# Altium PCB Mach dieu khien tu xa.PcbDoc
Units mm, origin at the board's own origin, x right, y up, seen from the top; angles counter-clockwise.
Board outline 143 x 70 mm, 2 copper layers (Top Layer, Bottom Layer); 76 components, 54 nets, 226 pads, 214 vias.
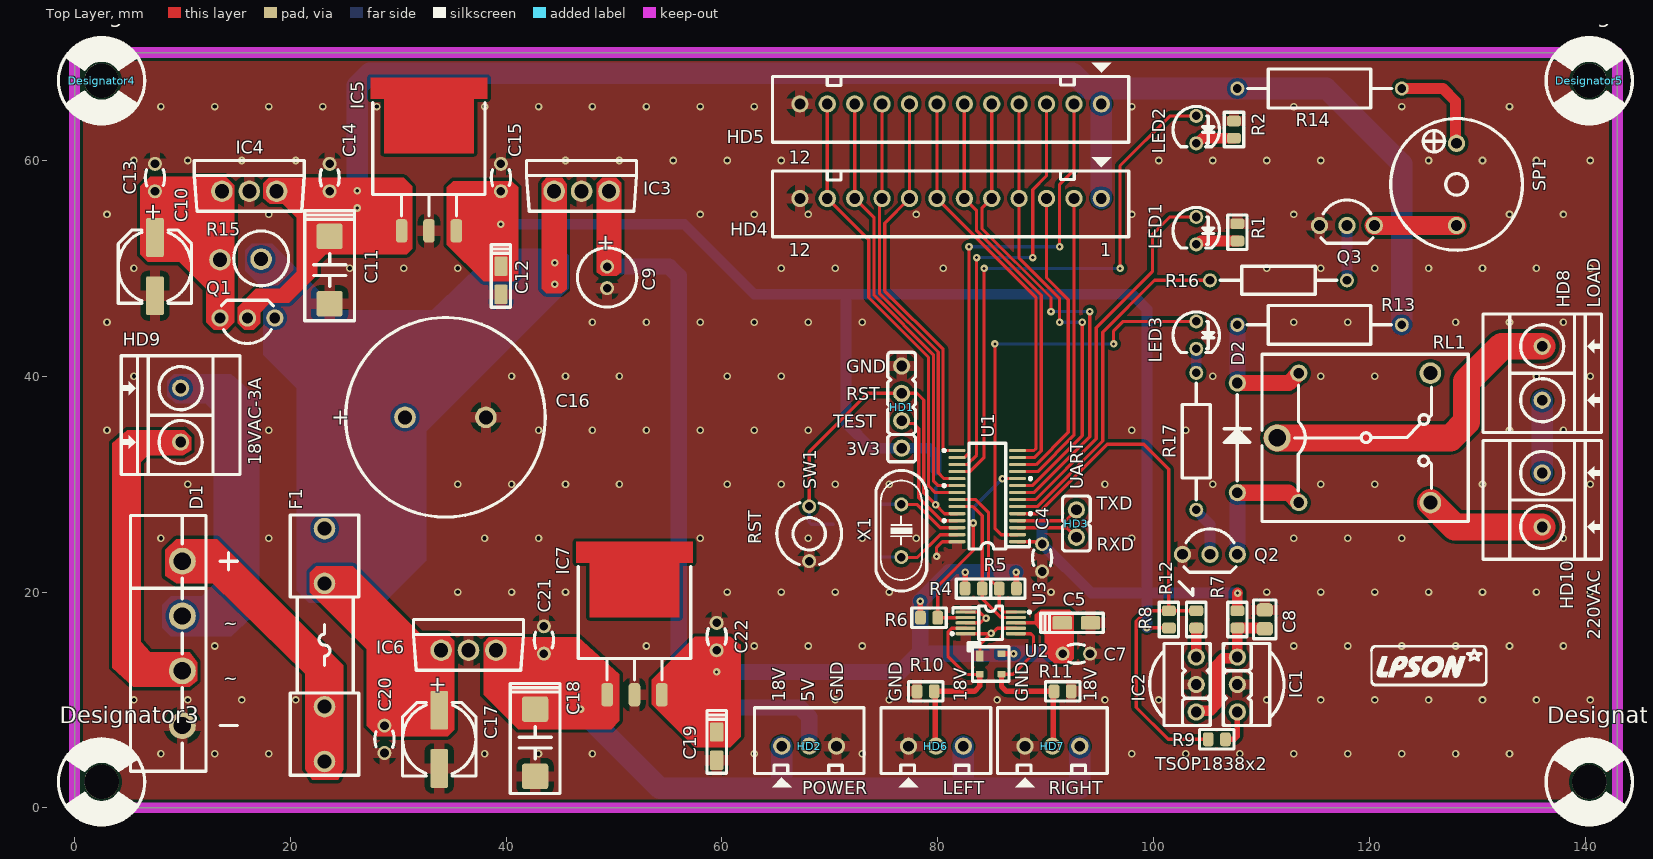
[diagram p0: Top Layer view]
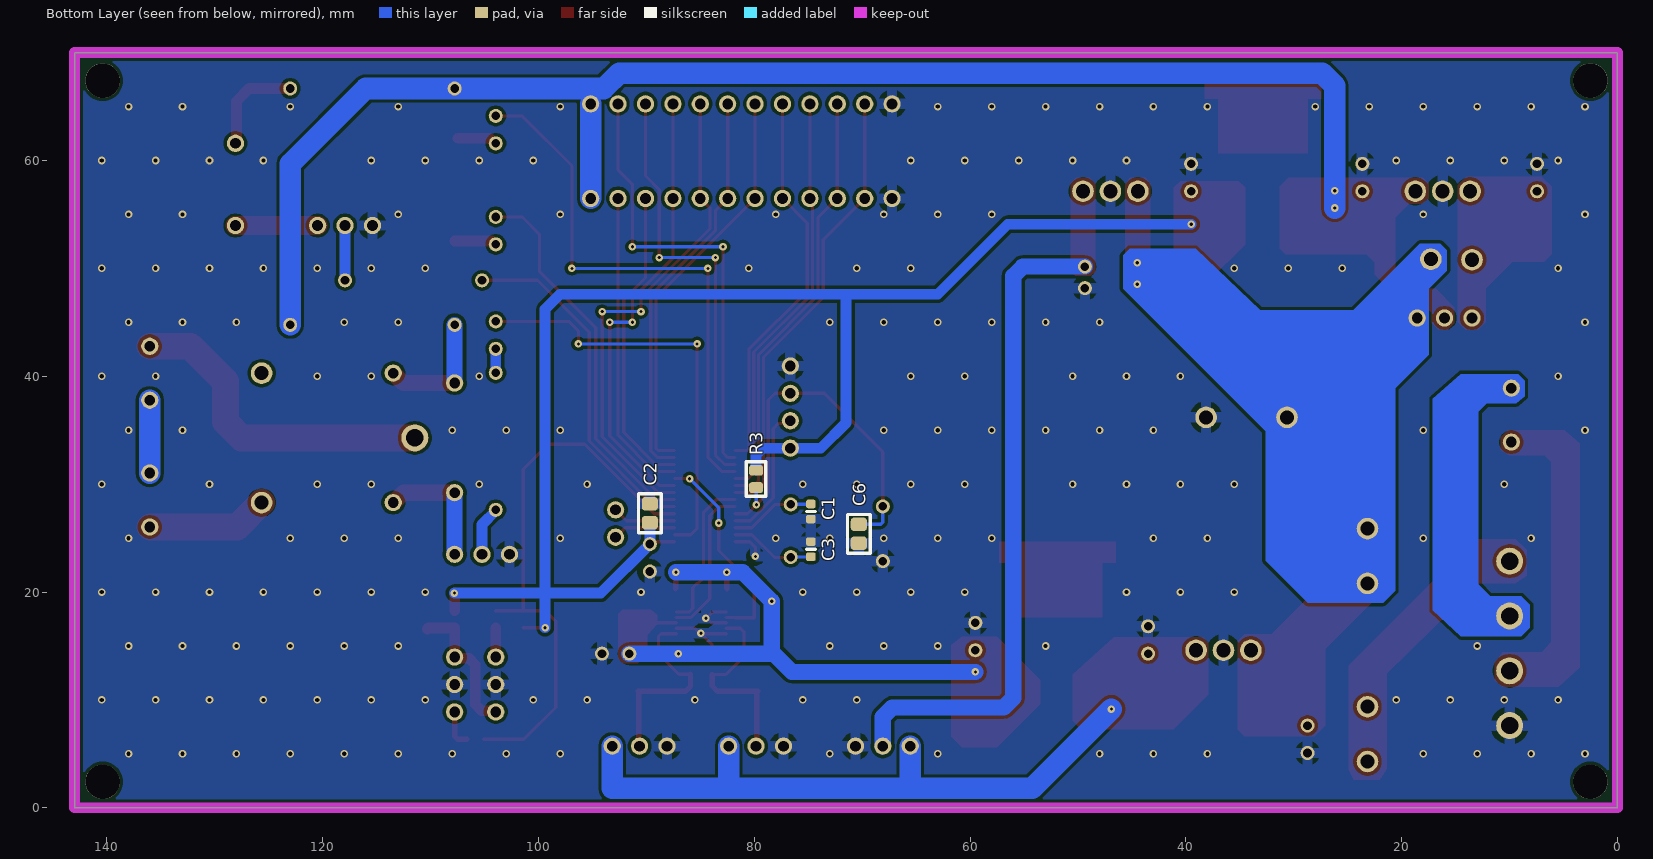
[diagram p1: Bottom Layer view, seen from below]

## Layer stack, top to bottom
Top Solder: solder mask 0.0102, Solder Resist, Dk 3.5
Top Layer: signal copper 0.0356
Dielectric1: dielectric 0.32, FR-4, Dk 4.8
Bottom Layer: signal copper 0.0356
Bottom Solder: solder mask 0.0102, Solder Resist, Dk 3.5

## Board outline
0,0 0,70 143,70 143,0

## Design rules (kind name [scope] priority, off if disabled: settings)
Clearance [All] p1: gap=0.3 ignorepadtopadclearanceinfootprint=FALSE except(0.15: Arc-Arc Arc-Track Arc-SMDPad Arc-THPad Arc-Via Arc-Text Arc-Hole Track-Track Track-SMDPad Track-THPad Track-Via Track-Text Track-Hole SMDPad-SMDPad SMDPad-THPad SMDPad-Via SMDPad-Text SMDPad-Hole THPad-THPad THPad-Via THPad-Text THPad-Hole Via-Via Via-Text Via-Hole Text-Text Text-Hole)
PlaneConnect [All] p1: planeconnectstyle=Relief reliefexpansion=0.5 reliefentries=4 reliefconductorwidth=0.5 reliefairgap=0.5
PolygonConnect [All] p1: connectstyle=Relief reliefconductorwidth=1 reliefentries=4 polygonreliefangle="90 Angle" airgapwidth=0.5
RoutingVias RoutingVias_POWER [InNetClass('POWER')] p1: holewidth=0.3 width=0.7 viastyle="Through Hole" minholewidth=0.3 minwidth=0.7 maxholewidth=0.6 maxwidth=1.1
RoutingVias RoutingVias_SIGNAL [All] p2: holewidth=0.3 width=0.7 viastyle="Through Hole" minholewidth=0.3 minwidth=0.7 maxholewidth=0.3 maxwidth=0.7
SolderMaskExpansion [All] p1: expansion=0.102 istentingtop=FALSE
Width Width_POWER [InNetClass('POWER')] p1: maxlimit=3 minlimit=0.3 preferedwidth=0.5
Width Width_SIGNAL [All] p2: maxlimit=0.3 minlimit=0.3 preferedwidth=0.3
29 further rules are at their usual default settings.

## Classes and differential pairs
net class POWER: 3.3VA 3V3 5V 12V 18V AIN0 AIN2 LEDA1 LEDA2 LEDB1 LEDB2 NetC8_1 NetC10_1 NetC16_1 NetD1_1 NetD1_2 NetD1_3 NetD2_1 NetD2_2 NetHD8_1 NetHD8_2 NetHD10_1 NetIC1_3 NetIC2_3 NetLED1_2 NetLED2_2 NetLED3_2 NetQ2_2 NetQ3_2 NetQ3_3 NetR4_1 NetR5_1 NetR14_2
component class "Mach dieu khien tu xa": C1 C2 C3 C4 C5 C6 C7 C8 C9 C10 C11 C12 C13 C14 C15 C16 C17 C18 C19 C20 C21 C22 D1 D2 F1 HD1 HD2 HD3 HD4 HD5 HD6 HD7 HD8 HD9 HD10 IC1 IC2 IC3 IC4 IC5 IC6 IC7 LED1 LED2 LED3 Q1 Q2 Q3 R1 R2 R3 R4 R5 R6 R7 R8 R9 R10 R11 R12 R13 R14 R15 R16 R17 RL1 SP1 SW1 U1 U2 U3 X1

## Components (designator, comment, footprint, x,y, rotation, side; value= is the part's Value field where it differs from the comment)
C1 "22pF" C0603 74.755,27.464 r90 bottom
C2 "10uF/16V" C0805 89.677,27.305 r90 bottom value=10uF/50V
C3 "22pF" C0603 74.755,23.971 r270 bottom
C4 "100nF/16V" "Tu gom 104" 89.677,23.178 r90 top value=0.1uF
C5 "10uF/16V" CAP_TANTA_10UF_16V 92.852,17.145 r0 top
C6 "1nF" C0805 70.31,25.4 r90 bottom
C7 "100nF/16V" "Tu gom 104" 92.852,14.287 r180 top value=0.1uF
C8 "Cap Pol1" C0805 110.315,17.462 r90 top value=4.7uF/16V
C9 "10uF/16V" CAP_10UF_16V 49.355,50.165 r270 top
C10 "10uF/50V" C_FC_10UF_50V 7.445,50.165 r270 top
C11 "10uF/35V" CAP_TANTA_10UF_35V 23.637,49.848 r270 top
C12 "10uF/16V" CAP_TANTA_10UF_16V 39.512,48.895 r270 top
C13 "100nF/50V" "Tu gom 104" 7.445,58.42 r270 top value=0.1uF
C14 "100nF/25V" "Tu gom 104" 23.637,58.42 r270 top value=0.1uF
C15 "100nF/16V" "Tu gom 104" 39.512,58.42 r270 top value=0.1uF
C16 "3300uF/50V" CAP_3300UF_50V 30.622,36.195 r0 top value=10uF/50V
C17 "10uF/50V" C_FC_10UF_50V 33.797,6.35 r270 top
C18 "10uF/35V" CAP_TANTA_10UF_35V 42.687,6.032 r270 top
C19 "10uF/16V" CAP_TANTA_10UF_16V 59.515,5.715 r270 top
C20 "100nF/50V" "Tu gom 104" 28.717,6.35 r90 top value=0.1uF
C21 "100nF/25V" "Tu gom 104" 43.498,15.557 r270 top value=0.1uF
C22 "100nF/16V" "Tu gom 104" 59.515,15.875 r270 top value=0.1uF
D1 "KBU1010" KBU1010G 9.985,15.24 r270 top
D2 "1N4007" 1N4007 107.775,34.29 r90 top
Designator3 "Comment" "Screw 3.0 v2" 2.5,2.4 r0 top
Designator4 "Comment" "Screw 3.0 v2" 2.5,67.4 r0 top
Designator5 "Comment" "Screw 3.0 v2" 140.4,67.4 r0 top
Designator6 "Comment" "Screw 3.0 v2" 140.4,2.4 r0 top
F1 "Fuse/2.5A" FUSE2_5A 23.165,15.085 r90 top value=Fuse
HD1 "SpyBiWire" Header_4 76.66,37.148 r90 top value="Header 4"
HD2 "Power" CON3 68.087,5.715 r0 top value="Header 3"
HD3 "UART" Header_2 92.852,26.353 r90 top value="Header 2"
HD4 "Display Port 1" CON12 81.197,56.487 r180 top value="Header 5"
HD5 "Display Port 2" CON12 81.197,65.25 r180 top value="Header 5"
HD6 "UM-18 LEFT" CON3 79.835,5.715 r0 top value="Header 3"
HD7 "UM-18 RIGHT" CON3 90.63,5.715 r0 top value="Header 3"
HD8 "Domino" DOMINO2_GREEN 136.032,37.783 r90 top value="Header 2"
HD9 "18VAC-3A" DOMINO2_GREEN 9.83,38.897 r270 top value="Header 2"
HD10 "220VAC" DOMINO2_GREEN 136.032,26.035 r90 top value="Header 2"
IC1 "TSOP1838" TSOP1838 107.775,11.43 r90 top
IC2 "TSOP1838" TSOP1838 103.965,11.43 r270 top
IC3 "LM7805" LM7805 46.99,57.15 r0 top
IC4 "LM7812" LM7805 16.192,57.15 r0 top
IC5 "LM1086 (3.3V)" LM1086 32.845,53.482 r270 top
IC6 "LM7818" LM7805 36.513,14.605 r0 top
IC7 "LM1086 (3.3V)" LM1086 51.895,10.477 r270 top
LED1 "RED" LED3R 103.965,54.769 r270 top value="LED 3 ly Single Colour"
LED2 "GREEN" LED3R 103.965,64.135 r270 top value="LED 3 ly Single Colour"
LED3 "LED" LED3R 103.965,45.085 r270 top value="LED 3 ly Single Colour"
Q1 "KSA1013" KSA1013 16.017,45.403 r180 top
Q2 "2N2222" 2N2222 105.235,23.495 r0 top value=P2N2222AG
Q3 "2N2222" 2N2222 117.935,53.975 r0 top value=P2N2222AG
R1 "Res2" RESC2012(0805) 107.775,53.34 r270 top value=1K
R2 "Res2" RESC2012(0805) 107.457,62.865 r270 top value=1K
R3 "Res2" RESC2012(0805) 79.835,30.48 r90 bottom value=47K
R4 "Res2" RESC2012(0805) 83.327,20.32 r180 top value=10K
R5 "Res2" RESC2012(0805) 86.502,20.32 r0 top value=10K
R6 "Res2" RESC2012(0805) 79.2,17.621 r180 top value=10K
R7 "Res2" RESC2012(0805) 107.775,17.462 r90 top value=330R
R8 "Res2" RESC2012(0805) 101.425,17.462 r270 top value=10K
R9 "Res2" RESC2012(0805) 105.87,6.35 r180 top value=0R
R10 "Resistor 1/4W" RESC2012(0805) 78.882,10.795 r180 top value=200K
R11 "Resistor 1/4W" RESC2012(0805) 91.582,10.795 r0 top value=200K
R12 "Res2" RESC2012(0805) 103.965,17.462 r90 top value=0R
R13 "Res2" CFR1WS 115.395,44.768 r180 top value=220R/1W
R14 "Res2" CFR1WS 115.395,66.675 r0 top value=220R/1W
R15 "Res2" R2WD 13.477,50.8 r0 top value=3R/2W
R16 "Res2" "RES 1/4W CFR25" 105.235,48.895 r0 top value=2K2
R17 "Res2" "RES 1/4W CFR25" 103.965,27.623 r90 top value=330R
RL1 "Relay 10A/5V" RL_10A_5V 118.57,34.29 r0 top value="Relay SPDT, 10A, 12V"
SP1 "Speaker" SPEAKER 128.095,61.595 r270 top value="Speaker Chip"
SW1 "RESET" "BUTTON 2PIN TRON" 68.087,27.94 r270 top value="SW chip 2 pin"
U1 "MSP430G2553" MSP430G2253IPW28R 84.597,28.893 r90 top
U2 "ADS1115" ADS1115 84.915,17.145 r270 top
U3 "PRTR5V0U2X" PRTR5V0U2X 84.915,13.335 r270 top
X1 "12Mhz" CRYSTAL 76.625,25.682 r270 top value=4Mhz

## Footprints (in the part's own frame and the unit in brackets; to place one, negate y for a bottom-side part, rotate by r counter-clockwise, add the part's x,y. Pads: shape width x height; smd on the part's side, far side on the other; paste and mask are expansions set on the pad)
1N4007 [mm] "DIODE_DIP"
  round 1.6 hole 1 mask+0.1: 1(-5.08,0) 2(5.08,0)
  silkscreen extent -4,-1.2 4,1.21, body extent -5.8,-1.25 5.8,1.25, height 2.75
2N2222 [mm] "TO-92 Bent Lead, Flat Index; 3 In-Line, Axial Leads; Body Dia. 4.5mm; Leads 0.51 x 0.48 mm (max)"
  round 1.6 hole 1 mask+0.1: 1(-2.54,0) 2(0,0)
  round 1.6 hole 1: 3(2.54,0)
  silkscreen extent -2.41,-1.65 2.41,2.37, body extent -2.79,-1.59 2.79,2.61, height 10
ADS1115 [mm] "MSOP-10, 16-Bit  Analog-to-Digital"
  rrect50% 0.3x1.85 smd mask+0.05: 1(-1,-2.325) 2(-0.5,-2.325) 3(0,-2.325) 4(0.5,-2.325) 5(1,-2.325) 6(1,2.325) 7(0.5,2.325) 8(0,2.325) 9(-0.5,2.325) 10(-1,2.325)
  silkscreen extent -1.55,-3.67 1.55,3.68, body extent -1.5,-2.45 1.5,2.45, height 1.15
"BUTTON 2PIN TRON" [mm] "PIN TO PIN 5.08, W=6MM"
  round 1.3 hole 0.8: 1(0,0) 2(5.08,0)
  silkscreen extent -0.33,-3 5.4,3
C0603 [mm] "Chip Capacitor, Body 1.6x0.8mm, 1608"
  rrect50% 0.8x0.9 smd: 1(-0.7,0) 2(0.7,0)
  silkscreen extent 0,-0.4 0,0.4, body extent -0.8,-0.4 0.8,0.4, height 0.6
C0805 [mm] "Chip Capacitor, 2-Leads, Body 2.0x1.3mm, IPC Medium Density"
  rrect50% 1.25x1.5 smd: 1(-0.875,0) 2(0.875,0)
  silkscreen extent -1.8,-1.05 1.8,1.05, body extent -1,-0.6 1,0.6, height 0.95
C_FC_10UF_50V [mm] "ALUMINUM CAPACITOR 6.8x6.8x5.5mm"
  rrect20% 3.6x1.65 smd mask+0.1: 1(-2.7,0) 2(2.7,0)
  silkscreen extent -3.4,-3.4 3.4,3.4, body extent -3.65,-3.3 3.65,3.3, height 7.7
CAP_10UF_16V [mm] "Capacitor, Electrolytic, Radial; Body 5 x 11 mm (Dia.xH typ); Pin Spacing 2 mm (typ)"
  round 1.3 hole 0.8: 1(0,0) 2(2,0)
  silkscreen extent -1.75,-2.75 3.75,2.75, body extent -1.53,-2.53 3.53,2.53, height 11.53
CAP_3300UF_50V [mm] "Capacitor, Electrolytic, Radial; Body 18 x 35.5 mm (Dia.xH typ); Pin Spacing 7.5 mm (typ)"
  round 2 hole 1.3: 1(0,0) 2(7.5,0)
  silkscreen extent -5.5,-9.25 13,9.25
CAP_TANTA_10UF_16V [mm] "CAP TANTALUM 10UF 16V 10% C1206(3216), Body 3.2x1.6mm"
  rrect20% 1.8x1.23 smd: 1(-1.31,0) 2(1.31,0)
  silkscreen extent -3.3,-0.9 2.5,0.9, body extent -1.6,-0.8 1.6,0.8, height 1
CAP_TANTA_10UF_35V [mm] "CAP TANTALUM 10UF 35V 10% C2917(7343), Body 7.3x4.3mm"
  rrect20% 2.37x2.43 smd: 1(-3.12,0) 2(3.12,0)
  silkscreen extent -5.5,-2.3 4.7,2.3, body extent -3.8,-2.3 3.8,2.3, height 3.1
CFR1WS [mm] "RESISTOR_1W"
  round 1.3 hole 0.8: 1(-7.62,0) 2(7.62,0)
  silkscreen extent -6.68,-1.8 6.7,1.8
CON3 [mm] "CON 3"
  round 1.6 hole 1 mask+0.1: 1(-2.54,0) 2(0,0) 3(2.54,0)
  silkscreen extent -5.08,-3.8 5.08,3.56, body extent -5,-2.29 5,3.41, height 7
CON12 [mm] "CON12"
  round 1.6 hole 1 mask+0.1: 1(-13.97,0) 2(-11.43,0) 3(-8.89,0) 4(-6.35,0) 5(-3.81,0) 6(-1.27,0) 7(1.27,0) 8(3.81,0) 9(6.35,0) 10(8.89,0) 11(11.43,0) 12(13.97,0)
  silkscreen extent -16.51,-3.8 16.51,3.56, body extent -16.3,-2.29 16.3,3.41, height 7
CRYSTAL [mm] "Quartz Crystal, Thru-Hole; 2 Leads; Body 11.35 x 4.65 x 13.46 mm (LxWxH max)"
  round 1.3 hole 0.8 mask+0.1: 1(-2.44,0) 2(2.44,0)
  silkscreen extent -5.59,-2.35 5.59,2.35, body extent -5.49,-2.25 5.49,2.25, height 3.6
DOMINO2_GREEN [mm] "10A PIN TO PIN 5mm 11mmx11mm"
  round 1.6 hole 1 mask+0.1: 1(0,0) 2(5,0)
  silkscreen extent -3,-5.5 8,5.5, body extent -3.14,-4.05 7.62,4.95, height 12.5
FUSE2_5A [mm] "Fuse 2.5A  250V"
  round 2 hole 1.3: 1(-10.795,0) 1(-5.715,0) 2(5.715,0) 2(10.795,0)
  silkscreen extent -12.06,-3.18 12.06,3.18, body extent -11.3,-3.09 11.4,3.1, height 9.6
Header_2 [mm] "Connector DIP, 2Pin_2.54mm"
  round 1.6 hole 1 mask+0.1: 1(-1.27,0) 2(1.27,0)
  silkscreen extent -2.54,-1.28 2.54,1.28, body extent -2.54,-1.27 2.54,1.27, height 10.1
Header_4 [mm] "Connector DIP, 4Pin_2.54mm"
  round 1.6 hole 1 mask+0.1: 1(-3.81,0) 2(-1.27,0) 3(1.27,0) 4(3.81,0)
  silkscreen extent -5.08,-1.28 5.08,1.28, body extent -5.08,-1.27 5.08,1.27, height 10.1
KBU1010G [mm] "KBP206 bridge diode 10A"
  round 2.5 hole 1.6 mask+0.1: 1(-7.62,0) 2(-2.54,0) 3(2.54,0) 4(7.62,0)
  silkscreen extent -11.85,-4.8 11.85,2.2, body extent -11.6,-4.75 11.6,2.2, height 18.65
KSA1013 [mm] "TO-92 Bent Lead, Flat Index; 3 In-Line, Axial Leads; Body Dia. 4.5mm; Leads 0.51 x 0.48 mm (max)"
  round 1.6 hole 1 mask+0.1: 1(-2.54,0) 2(0,0)
  round 1.6 hole 1: 3(2.54,0)
  silkscreen extent -2.41,-1.65 2.41,2.37, body extent -2.79,-1.59 2.79,2.61, height 10
LED3R [mm] "LED 3mm_RED"
  round 1.3 hole 0.8: 1(0,0) 2(2.54,0)
  silkscreen extent -0.88,-2.15 2.87,2.15, body extent -0.73,-2 2.94,2, height 4.6
LM1086 [mm] "TO-263 1.5A Low Dropout Positive Regulators"
  rrect50% 2.16x1.07 smd mask+0.1: 1(0,-2.54) 2(0,0) 3(0,2.54)
  Top Layer region: -14.17,-5.4 -14.17,5.4 -12.26,5.4 -12.26,4.165 -7.18,4.165 -7.18,-4.165 -12.26,-4.165 -12.26,-5.4
  silkscreen extent -11.88,-5.21 -1.4,5.21, body extent -14.52,-5 1.15,5, height 4.78
LM7805 [mm] "POWER IC 7805"
  round 2 hole 1.3: 1(-2.54,0) 2(0,0) 3(2.54,0)
  silkscreen extent -5.1,-1.85 5.1,2.85, body extent -5.56,-1.63 5.65,3.06, height 19.17
MSP430G2253IPW28R [mm] "TSSOP PW 28  PIN TO PIN 0.65"
  oval 0.3x1.6 smd mask+0.1: 1(-4.225,-2.8) 2(-3.575,-2.8) 3(-2.925,-2.8) 4(-2.275,-2.8) 5(-1.625,-2.8) 6(-0.975,-2.8) 7(-0.325,-2.8) 8(0.325,-2.8) 9(0.975,-2.8) 10(1.625,-2.8) 11(2.275,-2.8) 12(2.925,-2.8) 13(3.575,-2.8) 14(4.225,-2.8) 15(4.225,2.8) 16(3.575,2.8) 17(2.925,2.8) 18(2.275,2.8) 19(1.625,2.8) 20(0.975,2.8) 21(0.325,2.8) 22(-0.325,2.8) 23(-0.975,2.8) 24(-1.625,2.8) 25(-2.275,2.8) 26(-2.925,2.8) 27(-3.575,2.8) 28(-4.225,2.8)
  silkscreen extent -4.9,-4.1 4.9,4.1, body extent -4.9,-3.31 4.9,3.31, height 1.2
PRTR5V0U2X [mm] "SOT143B Ultra low capacitance double rail-to-rail ESD protection diode"
  rrect10% 1x0.7 smd mask+0.1: 1(-0.75,-1)
  rrect10% 0.6x0.7 smd mask+0.1: 2(0.95,-1) 3(0.95,1) 4(-0.95,1)
  silkscreen extent -2,-2.1 1.6,1.7
R2WD [mm] "R2W, 2 pin 3.81mm stand"
  round 2 hole 1.3: 1(0,0) 2(3.81,0.051)
  silkscreen extent 1.27,-2.41 6.35,2.66
"RES 1/4W CFR25" [mm] "Axial Device, Thru-Hole; 2 Leads fi 0.55"
  round 1.3 hole 0.8 mask+0.1: 1(0,0) 2(12.7,0)
  silkscreen extent 0.94,-1.3 11.76,1.3, body extent 0.97,-1.16 11.74,1.16, height 2.93
RESC2012(0805) [mm] "Chip Resistor, Body 2.0x1.3mm, 1/8W 0805"
  rrect50% 1x1.3 smd: 1(-0.8,0) 2(0.8,0)
  silkscreen extent -1.6,-0.9 1.6,0.9, body extent -1,-0.62 1,0.63, height 0.6
RL_10A_5V [mm] "Relay SRD-05VDC-SL-C, 5 pin, 10A,19.1X15.5"
  round 2.5 hole 1.6: 1(-7.1,0)
  round 2 hole 1.3: 2(7.1,6) 3(7.1,-6)
  round 1.6 hole 1: 4(-5.1,-6) 5(-5.1,6)
  silkscreen extent -8.5,-7.75 10.6,7.75, body extent -8.5,-7.75 10.6,7.75, height 15.3
"Screw 3.0 v2" [mm] "Hole 3.2mm outline 8mm"
  round 3.2 hole 3.2 mask+0.1: 1(0,0)
  silkscreen extent -4,-4 4,4, body extent -2.5,-2.5 2.5,2.5, height 1.73
SPEAKER [mm] "TMB12A05"
  round 1.6 hole 1 mask+0.1: 1(0,0) 2(7.62,0)
  silkscreen extent -2.29,-6.1 9.91,6.1
TSOP1838 [mm] "Connector DIP, 3Pin_2.54mm"
  round 1.6 hole 1 mask+0.1: 1(2.54,0) 2(0,0) 3(-2.54,0)
  silkscreen extent -3.81,-4.32 3.81,1.3
"Tu gom 104" [mm] "Capacitor, Radial, Tantalum, Non-Polarised; Body 3.05 x 1.78 x 3.43 mm (WxTxH max); Pin Spacing 2.54 mm (typ)"
  round 1.3 hole 0.8: 1(-1.27,0) 2(1.27,0)
  silkscreen extent -0.73,-0.89 0.76,0.89, body extent -2.92,-0.85 2.92,0.85, height 6.42

## Part data
C1 C3: library part CN1, "0805-SMD Capacitor"
C2 C16: library part CP1, "Cap P  0,1uF < 22uF , 16 - 50V", Description 1="10 => 220uF/6,3V/10V - 10uF => 100uF/16V", Description 2="0,1uF => 33uF/50V - 10uF => 22uF/63V", Description 3="0,47uF => 10uF/100V"
C4 C6 C7 C13 C14 C15 C20 C21 C22: library part CN2, "Cap np 104 => 105pF"
C5 C11 C12 C18 C19: library part CP1, "Tantalum Capacitor", datasheet=http://www.kemet.com/Lists/ProductCatalog/Attachments/254/KEM_T2005_T491.pdf, Type=Tantalum
  C5 C12 C19: Digikey=http://www.digikey.com/product-detail/en/T491A106M016AT/399-3687-1-ND/819012
  C11 C18: Digikey=http://www.digikey.com/product-detail/en/T491C106K025AT/399-3734-1-ND/819059
C8: "Polarized Capacitor (Radial)", LatestRevisionDate=17-Jul-2002, LatestRevisionNote="Re-released for DXP Platform.", PackageDescription="Polarized Capacitor (Radial); 2 Leads", PackageReference=RB7.6-15, Published=8-Jun-2000, Publisher="Altium Limited"
C9 C10 C17: library part CP1, "Aluminium Capacitor"
  C10: Description 1="10 => 220uF/6,3V/10V - 10uF => 100uF/16V", Description 2="0,1uF => 33uF/50V - 10uF => 22uF/63V", Description 3="0,47uF => 10uF/100V"
D1: "10A glass passivated bridge rectifier", datasheet=http://www.comchiptech.com/cms/UserFiles/KBU10005-G%20Thru.%20KBU1010-G%20Series%20RevA.pdf, Digikey=http://www.digikey.com/product-detail/en/KBU1010-G/641-1359-ND/2074824
D2: library part D1A, "Diode 1A"
F1: library part Fuse, "Fuse", Designed by=VanDungEvn
HD1: library part Hed4, "Header 4 (Green)"
HD2 HD6 HD7: library part Hed3, "Header 3 (Green)"
HD3 HD8 HD9 HD10: library part Hed2, "Header 2 (Green)"
HD4 HD5: library part Hed12, "Header 12"
IC3 IC5 IC6 IC7: library part LM78xx, "Linear Regulator"
  IC3: datasheet=http://www.fairchildsemi.com/ds/LM/LM7805.pdf, Digikey=http://www.digikey.com/product-detail/en/LM7805CT/LM7805CT-ND/458698
  IC5 IC7: datasheet=http://www.ti.com/lit/ds/symlink/lm1086.pdf, Digikey=http://www.digikey.com/product-detail/en/LM1086CSX-3.3%2FNOPB/LM1086CSX-3.3%2FNOPBCT-ND/3440095
  IC6: datasheet=http://www.fairchildsemi.com/ds/LM/LM7805.pdf, Digikey=http://www.digikey.com/product-detail/en/LM7818CT/LM7818CT-ND/1923054
IC4: library part LM78xx, "Linear Regulator", Manufacturer="Fairchild Semiconductor", datasheet=http://www.fairchildsemi.com/ds/LM/LM7805.pdf, Digikey=http://www.digikey.com/product-detail/en/LM7812ACT/LM7812ACT-ND/1923050
LED1 LED2: library part LED, "LED Single colour Green and Red"
LED3: "LED Single colour Green and Red"
Q1: library part A1015, "PNP 600mW, ECB", Manufacturer="Fairchild Semiconductor", datasheet=http://www.fairchildsemi.com/ds/KS/KSA1013.pdf, Digikey=http://www.digikey.com/product-detail/en/KSA1013YBU/KSA1013YBUFS-ND/1048937
Q2 Q3: library part C1815, "TRANS GP SS NPN LP 40V TO92", Digikey=http://www.digikey.com/product-detail/en/P2N2222AG/P2N2222AGOS-ND/920244
R1 R2 R3 R4 R5 R6 R7 R8 R9 R12 R13 R14 R15 R16 R17: "Resistor", LatestRevisionDate=17-Jul-2002, LatestRevisionNote="Re-released for DXP Platform.", PackageDescription="Axial Device, Thru-Hole; 2 Leads; 0.4 in Pin Spacing", PackageReference=AXIAL-0.4, Published=8-Jun-2000, Publisher="Altium Limited"
R10 R11: library part Res2, datasheet=http://www.yageo.com/documents/recent/General%20Type_MFP.pdf, Digikey=http://www.digikey.com/product-detail/en/MFP-25BRD52-100K/100KADCT-ND/2059112
RL1: library part "Relay 1", "Relay SPDT,10A - 12VDC 5 Pin"
SP1: library part SPK, "Speaker Chip"
SW1: library part SW2, "Switch button 2 pin"
U1: "MSP430G2553 (28 pins)", datasheet=http://www.ti.com/lit/ds/symlink/msp430g2553.pdf, Digikey=http://www.digikey.com/product-detail/en/MSP430G2553IPW28R/296-28431-1-ND/2638890
U2: "Analog to Digital Converter", datasheet=http://www.ti.com/lit/ds/symlink/ads1113.pdf, Digikey=http://www.digikey.com/product-detail/en/ADS1115IDGST/296-24934-1-ND/2123298
U3: "ESD protection diode", datasheet=http://www.nxp.com/documents/data_sheet/PRTR5V0U2X.pdf, Digikey=http://www.digikey.com/product-detail/en/PRTR5V0U2X,215/568-4140-1-ND/1589981
X1: library part XT2, "Crystal For all Crystal 2pin."

## Via types
v1: diameter 0.7, hole 0.4, Top Layer to Bottom Layer, 183 vias
v2: diameter 0.7, hole 0.3, Top Layer to Bottom Layer, 31 vias

## Nets (pads, with @x,y where several pads share a name; then routed paths per layer and width w, separated by ;. In a path a pad name is that pad's centre, name@x,y a point inside that pad or via, vN(x,y) a via of type N, cw(c..) or ccw(c..) an arc to the next point about the centre after c; other vN are vias at no path point)
3.3VA: C5.1 C7.2 C19.1 C22.2 IC7.3 R4.2 R5.2 R6.2 U2.8 U3.4 | length 60.6
  Top Layer w0.3: U3.4 U3.4@85.917,14.282 ; v2@87.027,14.282 v2(87.03,14.28) ; U2.8 C5.1 91.582,17.105 C7.2
  Top Layer w0.5: v2(59.5,12.6) v2@59.507,12.608 ; C22.2@59.507,14.597 C22.2 ; v2(78.38,19.15) 78.39,19.14 78.39,17.631 R6.2 ; R4.2 82.54,20.333 82.54,21.824 v2(82.553,21.837) ; U3.4@85.917,14.282 v2@87.027,14.282 ; v2(87.263,21.837) 87.283,21.817 87.283,20.34 R5.2
  Bottom Layer w1.5: v2(59.5,12.6) 76.51,12.6 78.19,14.28 ; v2(87.263,21.837) v2(82.553,21.837) 81.067,21.837 v2(78.38,19.15) 78.38,14.47 78.19,14.28 ; C7.2 91.575,14.28 v2(87.03,14.28) 78.19,14.28
3V3: C2.1 C4.2 C12.1 C15.2 HD1.1 IC5.3 R3.2 R7.2 R8.2 U1.1 | length 146.7
  Top Layer w0.3: U1.1 89.187,24.667 89.407,24.448 C4.2 ; v2(99.388,16.7) 99.407,16.681 101.406,16.681 R8.2
  Top Layer w1: v2(39.5,54.1) 39.512,54.113 C15.2 ; R7.2 107.775,19.875 v2(107.8,19.9)
  Bottom Layer w1: v2(39.5,54.1) 56.5,54.1 63,47.6 71.5,47.6 ; R3.2 79.835,32.752 79.249,33.338 HD1.1 73.838,33.338 71.5,35.675 71.5,47.6 ; C2.1 C4.2 94.225,19.9 99.388,19.9 ; v2(99.388,16.7) 99.388,19.9 ; v2(107.8,19.9) 99.388,19.9 ; 71.5,47.6 98,47.6 99.388,46.212 99.388,19.9
5V: C9.1 HD2.2 IC3.3 | length 61.6
  Bottom Layer w1.5: C9.1 55.121,50.165 56,49.286 56,10.179 56.879,9.3 67.209,9.3 68.087,8.421 HD2.2
12V: C11.1 C14.2 HD4.1 HD5.1 IC4.3 IC5.1 Q1.2 R13.1 R14.1 | length 135.8
  Bottom Layer w2: v2(26.2,55.6) v2(26.2,57.2) 26.2,66.928 27.372,68.1 92.534,68.1 93.959,66.675 R14.1 116.015,66.675 123.015,59.675 R13.1 ; HD4.1 HD5.1
18V: C18.1 C21.2 HD2.1 HD6.3 HD7.3 IC6.3 IC7.1 | length 65.3
  Top Layer w1: C18.1 46.897,9.152 v2(46.9,9.15)
  Bottom Layer w2: v2(46.9,9.15) 54.25,1.8 65.5,1.8 ; HD2.1 65.547,1.847 65.5,1.8 ; HD6.3 82.375,1.925 82.25,1.8 ; HD7.3 93.17,1.8 82.25,1.8 ; 65.5,1.8 82.25,1.8
AIN0: HD6.2 R10.1 U2.4 U3.2 | length 18.3
  Top Layer w0.3: U2.4 81.305,16.645 80.95,16.29 80.95,14.06 82.66,12.35 U3.2@83.88,12.35
  Top Layer w0.5: HD6.2 79.759,5.791 79.759,10.719 R10.1 83.395,10.795 83.915,11.315 83.915,12.335 83.9,12.35 U3.2@83.88,12.35
AIN2: HD7.2 R11.1 U2.6 U3.3 | length 18.4
  Top Layer w0.3: U3.3 86.985,12.385 88.88,14.28 88.88,15.89 88.625,16.145 U2.6
  Top Layer w0.5: U3.3 85.915,11.265 86.385,10.795 R11.1 90.706,10.719 90.706,5.791 HD7.2
ALERT: R6.1 U1.10 U2.2 | length 19.4
  Top Layer w0.3: U2.2 81.815,17.645 81.791,17.621 R6.1 80,20.553 83.3,23.853 v2(83.3,26.4) ; v2(86,30.5) 86.018,30.518 U1.10
  Bottom Layer w0.3: v2(83.3,26.4) 83.3,27.8 v2(86,30.5)
BUZZ: R16.1 U1.6 | length 32.4
  Top Layer w0.3: U1.6 89.218,27.918 95.3,34 95.3,44.1 100.095,48.895 R16.1
GND: C1.1 C2.2 C3.1 C4.1 C5.2 C6.1 C7.1 C8.2 C9.2 C10.2 C11.2 C12.2 C13.1 C14.1 C15.1 C16.2 C17.2 C18.2 C19.2 C20.1 C21.1 C22.1 D1.4 HD1.4 HD2.3 HD4.12 HD5.12 HD6.1 HD7.1 IC1.2 IC2.2 IC3.2 IC4.2 IC5.2 IC6.2 IC7.2 Q2.1 Q3.1 R1.1 R2.1 R10.2 R11.2 SW1.2 U1.28 U2.1 U2.3 U2.5 U2.7 U3.1 | length 14.5
  Top Layer w0.3: v2(79.9,23.3) 79.9,24.135 80.432,24.667 U1.28 ; U2.5 v2@84.925,16.145 ; U2.3 83.965,17.145 84.4,17.58 v2(84.48,17.58) 83.915,18.145 U2.1 ; U3.1 83.915,15.135 v2@84.925,16.145 ; U2.7 85.533,16.645 85.058,16.17 v2(84.95,16.17) v2@84.925,16.145
  other v1: 3,5 8,5 13,5 18,5 38,5 43,5 48,5 63,5 73,5 98,5 103,5 108,5 113,5 118,5 123,5 128,5 133,5 138,5 5.5,10 10.5,10 15.5,10 20.5,10 70.5,10 75.5,10 85.5,10 95.5,10 100.5,10 110.5,10 115.5,10 120.5,10 125.5,10 130.5,10 135.5,10 140.5,10 13,15 53,15 63,15 68,15 73,15 113,15 118,15 123,15 128,15 133,15 138,15 35.5,20 40.5,20 45.5,20 60.5,20 65.5,20 70.5,20 75.5,20 90.5,20 110.5,20 115.5,20 120.5,20 125.5,20 130.5,20 135.5,20 140.5,20 8,25 18,25 38,25 43,25 58,25 63,25 68,25 73,25 78,25 98,25 113,25 118,25 123,25 138,25 10.5,30 35.5,30 40.5,30 45.5,30 50.5,30 60.5,30 65.5,30 70.5,30 75.5,30 95.5,30 105.5,30 115.5,30 120.5,30 130.5,30 140.5,30 3,35 18,35 43,35 48,35 53,35 58,35 63,35 68,35 98,35 103,35 108,35 133,35 138,35 5.5,40 40.5,40 45.5,40 50.5,40 60.5,40 65.5,40 105.5,40 115.5,40 120.5,40 135.5,40 140.5,40 3,45 48,45 53,45 58,45 63,45 68,45 73,45 113,45 118,45 128,45 133,45 138,45 5.5,50 25.5,50 30.5,50 35.5,50 65.5,50 70.5,50 80.5,50 110.5,50 115.5,50 120.5,50 125.5,50 130.5,50 135.5,50 140.5,50 3,55 18,55 58,55 63,55 68,55 78,55 98,55 113,55 133,55 138,55 5.5,60 10.5,60 15.5,60 20.5,60 45.5,60 50.5,60 55.5,60 60.5,60 65.5,60 100.5,60 105.5,60 110.5,60 115.5,60 125.5,60 130.5,60 135.5,60 140.5,60 3,65 8,65 13,65 18,65 23,65 28,65 38,65 43,65 48,65 53,65 58,65 63,65 98,65 113,65 123,65 133,65 138,65
IREMOTE: R8.1 R9.2 R12.2 U1.5 | length 52.6
  Top Layer w0.3: U1.5 89.267,27.267 95.7,33.7 99.1,33.7 101.425,31.375 R8.1 ; R12.2 R8.1 ; R9.2 101.35,6.35 98.4,9.3 98.4,17.3 99.362,18.262 R8.1
LEDA1: HD4.2 U1.11 | length 28.6
  Top Layer w0.3: U1.11 89.267,31.167 92.627,34.526 HD4.2
LEDA2: HD4.3 U1.12 | length 28.5
  Top Layer w0.3: U1.12 89.118,31.818 92.1,34.8 92.1,47.1 90.087,49.114 HD4.3
LEDB1: HD5.2 U1.16 | length 42.6
  Top Layer w0.3: U1.16 82.448,32.467 82.9,32.92 v2(82.9,52) ; v2(91.3,52) 91.3,57.786 92.627,59.112 HD5.2
  Bottom Layer w0.3: v2(82.9,52) v2(91.3,52)
LEDB2: HD5.3 U1.17 | length 40.5
  Top Layer w0.3: U1.17 82.718,31.818 83.6,32.7 v2(83.6,51) ; v2(88.8,51) 88.8,57.305 90.087,58.591 HD5.3
  Bottom Layer w0.3: v2(83.6,51) v2(88.8,51)
NetC8_1: C8.1 IC1.1 IC2.1 R7.1 | length 13.3
  Top Layer w1: IC2.1 104.08,9.005 105.274,9.005 105.86,9.591 105.86,13.269 106.446,13.855 107.66,13.855 IC1.1 R7.1 110.24,16.663 C8.1
NetC10_1: C10.1 C13.2 IC4.1 Q1.3 R15.1
NetC16_1: C16.1 C17.1 C20.2 F1.2 IC3.1 IC6.1 Q1.1 R15.2
  other v2: 44.5,48.521 44.5,50.521
NetD1_1: D1.1 F1.1
NetD1_2: D1.2 HD9.1
NetD1_3: D1.3 HD9.2
NetD2_1: D2.1 Q2.3 RL1.4 | length 11.8
  Top Layer w1.5: D2.1 112.523,29.21 113.443,28.29 RL1.4
  Bottom Layer w1.5: Q2.3 D2.1
NetD2_2: D2.2 R13.2 RL1.5 | length 11.5
  Top Layer w1.5: D2.2 112.523,39.37 113.443,40.29 RL1.5
  Bottom Layer w1.5: D2.2 R13.2
NetHD8_1: HD8.1 HD10.2 | length 6.7
  Bottom Layer w2: HD10.2 HD8.1
NetHD8_2: HD8.2 RL1.1 | length 30.3
  Top Layer w2.5: RL1.1 127.536,34.29 129,35.754 129,39.5 132.282,42.783 HD8.2
NetHD10_1: HD10.1 RL1.3 | length 11.3
  Top Layer w2.5: RL1.3 127.925,26.035 HD10.1
NetIC1_3: IC1.3 R9.1 | length 3.5
  Top Layer w0.5: R9.1 107.482,6.35 107.775,6.643 IC1.3
NetIC2_3: IC2.3 R12.1 | length 2.7
  Top Layer w1: IC2.3 R12.1
NetLED1_2: LED1.2 R1.2 | length 3.9
  Top Layer w1: LED1.2 104.046,52.229 104.357,52.54 R1.2
NetLED2_2: LED2.2 R2.2 | length 3.7
  Top Layer w1: LED2.2 104.046,61.595 104.516,62.065 R2.2
NetLED3_2: LED3.2 R17.2 | length 2.2
  Bottom Layer w1: R17.2 LED3.2
NetQ2_2: Q2.2 R17.1 | length 4.7
  Bottom Layer w1: R17.1 103.965,27.541 105.235,26.271 Q2.2
NetQ3_2: Q3.2 R16.2 | length 5.1
  Bottom Layer w1: R16.2 Q3.2
NetQ3_3: Q3.3 SP1.2 | length 7.6
  Top Layer w1.8: Q3.3 SP1.2
NetR4_1: R4.1 U1.23 U2.9 | length 14.2
  Top Layer w0.3: U1.23 83.282,27.918 84.127,27.073 R4.1 84.127,19.373 85.855,17.645 U2.9
NetR5_1: R5.1 U1.22 U2.10 | length 14.4
  Top Layer w0.3: U1.22 83.532,28.567 84.7,27.4 84.7,21.322 85.264,20.758 85.36,20.758 85.703,20.416 R5.1 85.703,18.497 86.055,18.145 U2.10
NetR14_2: R14.2 SP1.1 | length 9.4
  Top Layer w1: R14.2 126.825,66.675 128,65.5 128,61.69 SP1.1
P1.5: LED1.1 U1.7 | length 35.5
  Top Layer w0.3: U1.7 89.067,28.567 94.7,34.2 94.7,44.5 99.9,49.7 99.9,53.138 101.531,54.769 LED1.1
P2.5: LED2.1 U1.18 | length 51.6
  Top Layer w0.3: U1.18 82.967,31.167 84.3,32.5 v2(84.3,50) ; v2(96.9,50) 96.9,59.5 101.535,64.135 LED2.1
  Bottom Layer w0.3: v2(84.3,50) v2(96.9,50)
RELAY: LED3.1 U1.2 | length 39.7
  Top Layer w0.3: v2(85.3,43) 85.3,25.9 85.882,25.318 U1.2 ; v2(96.3,43) 96.3,44.2 97.185,45.085 LED3.1
  Bottom Layer w0.3: v2(85.3,43) v2(96.3,43)
RESET: C6.2 HD1.3 R3.1 SW1.1 U1.24 | length 36
  Top Layer w0.3: SW1.1 68.087,32.987 73.518,38.418 HD1.3 78.083,38.418 78.7,37.8 78.7,29.2 v2(79.8,28.1) 80.633,27.267 U1.24
  Bottom Layer w0.3: SW1.1 68.087,26.451 68.263,26.275 C6.2 ; v2(79.8,28.1) 79.817,28.117 79.817,29.663 R3.1
RXD: HD3.1 U1.3 | length 5.8
  Top Layer w0.3: U1.3 91.967,25.967 HD3.1
SEG_A: HD4.4 HD5.4 U1.9 | length 42.3
  Top Layer w0.3: U1.9 88.768,29.867 93.4,34.5 v2(93.4,45) ; HD5.4 HD4.4 87.547,50.953 91.3,47.2 v2(91.3,45)
  Bottom Layer w0.3: v2(91.3,45) v2(93.4,45)
SEG_B: HD4.5 HD5.5 U1.8 | length 46.3
  Top Layer w0.3: HD5.5 HD4.5 84.1,55.58 84.1,53.7 90.5,47.3 v2(90.5,46) ; U1.8 88.918,29.218 94.1,34.4 v2(94.1,46)
  Bottom Layer w0.3: v2(90.5,46) v2(94.1,46)
SEG_C: HD4.6 HD5.6 U1.13 | length 37.6
  Top Layer w0.3: HD5.6 HD4.6 83.6,55.353 83.6,53.5 89.6,47.5 89.6,33.1 88.967,32.467 U1.13
SEG_D: HD4.7 HD5.7 U1.14 | length 37.5
  Top Layer w0.3: HD5.7 HD4.7 89.1,47.313 89.1,33.293 88.924,33.118 U1.14
SEG_E: HD4.8 HD5.8 U1.15 | length 36.5
  Top Layer w0.3: HD5.8 HD4.8 75.1,54.2 75.1,47.9 80.5,42.5 80.5,33.293 80.676,33.118 U1.15
SEG_F: HD4.9 HD5.9 U1.19 | length 38.5
  Top Layer w0.3: HD5.9 HD4.9 74.6,56.24 74.6,47.7 80.05,42.25 80.05,31.05 80.583,30.518 U1.19
SEG_G: HD4.10 HD5.10 U1.20 | length 40.3
  Top Layer w0.3: HD5.10 HD4.10 74.1,54.693 74.1,47.504 79.6,42.004 79.6,30.3 80.033,29.867 U1.20
SEG_H: HD4.11 HD5.11 U1.21 | length 42.2
  Top Layer w0.3: HD5.11 HD4.11 73.6,52.653 73.6,47.3 79.15,41.75 79.15,29.85 79.782,29.218 U1.21
TEST: HD1.2 U1.25 | length 12.7
  Top Layer w0.3: HD1.2 76.909,35.629 77.771,35.629 78.25,35.15 78.25,28.731 80.363,26.618 U1.25
TXD: HD3.2 U1.4 | length 5.9
  Top Layer w0.3: U1.4 91.847,26.618 HD3.2
XIN: C3.2 U1.27 X1.2 | length 7.9
  Top Layer w0.3: X1.2 76.667,23.2 78.1,23.2 80.218,25.318 U1.27
  Bottom Layer w0.3: C3.2 74.77,23.257 76.61,23.257 X1.2
XOUT: C1.2 U1.26 X1.1 | length 8
  Top Layer w0.3: X1.1 78.078,28.122 80.233,25.967 U1.26
  Bottom Layer w0.3: C1.2 74.776,28.143 76.604,28.143 X1.1
pads on no net: Designator3.1 Designator4.1 Designator5.1 Designator6.1 RL1.2

## Polygon pours and split planes (outlines as drawn)
GND on Bottom Layer "GND_L02_P000" (solid, remove dead copper, pour order 0): 0,0 0,70 143,70 143,0
GND on Top Layer "GND_L01_P001" (solid, remove dead copper, pour order 1): 0,0 0,70 143,70 143,0

## Keep-outs
Keep-Out Layer:
  the board outline again, w1

## Other copper
Top Layer:
  region net 12V: 17.5,57.9 18,58.4 30.5,58.4 31.3,57.6 31.3,51.8 30.8,51.3 20.6,51.3 20.6,54.7 19.3,56 18.1,56 17.5,56.5
  region net 12V: 20.6,51.3 20.6,49.7 19,48.1 16.8,48.1 15.1,46.4 15.1,44.9 15.7,44.3 16.6,44.3 17.2,44.9 17.2,45.9 18.1,46.8 19.9,46.8 22.5,49.4 22.5,50.5 23.3,51.3
  region net 3V3: 34.5,57.5 35.1,58.1 40.5,58.1 41.1,57.5 41.1,49.2 40.7,48.8 37.9,48.8 34.5,52.2
  region net NetC16_1: 43.3,57.9 43.7,58.4 45.184,58.4 45.6,57.822 45.6,48.067 45.16,47.7 43.7,47.7 43.3,48.1
  region net 5V: 48.4,57.9 48.9,58.4 50.21,58.4 50.65,57.944 50.65,49.629 50.266,49.3 48.843,49.3 48.4,49.664
  region net NetC10_1: 12.9,44.3 12.2,45 12.2,48.1 9.7,50.6 6.8,50.6 6.1,51.3 6.1,57.6 7,58.5 14,58.5 14.8,57.7 14.8,45 14.1,44.3
  region net 18V: 37.9,15.3 38.4,15.8 46.7,15.8 50.5,12.4 50.5,8.05 49.75,7.3 41.1,7.3 37.9,10.5
  region net NetC16_1: 21.8,21.8 22.4,22.4 25.8,22.4 32.1,16.1 34.6,16.1 35.2,15.5 35.2,7.233 34.6,6.633 28.1,6.6 27.1,7.6 27.1,14.7 21.8,20
  region net 3.3VA: 89.57,18.35 90.75,18.35 92.25,18.35 92.6,18 92.6,13.8 92.2,13.4 90.8,13.4 89.9,14.2 89.9,16 89,17 89,17.9
  region net 3.3VA: 53.5,11.85 57.5,15.85 60.75,15.85 61.75,15.1 61.75,6.6 60.75,5.6 57.5,5.6 53.5,9.6
  region net NetD1_1: 8.4,23.9 9.4,24.9 13.2,24.9 24.9,13.2 24.9,3.587 24.42,2.6 22.032,2.6 21.4,3.587 21.4,12.447 12.815,20.8 9.4,20.8 8.4,21.5
  region net NetD1_3: 3.5,33.8 4.89,34.99 10.169,35.007 10.8,34.352 10.8,33.141 10.068,32.7 6.8,32.7 6.12,32.02 6.12,15.4 7,14.4 10.655,14.4 11.35,13.516 11.35,11.8 10.655,11.2 5.447,11.2 3.5,13
Bottom Layer:
  region net NetD1_2: 8.6,38.8 8.6,39.6 9.2,40.2 14.5,40.2 17.1,37.9 17.1,18.3 14.5,15.9 8.9,15.9 8.1,16.7 8.1,18.8 8.9,19.6 11.8,19.6 12.9,20.7 12.9,36.7 12.1,37.5 9.36,37.5 8.6,38.133
  region net NetC16_1: 32.6,38 32.6,34.9 45.8,48.1 45.8,51.2 45.2,51.8 39.1,51.8 33.1,46.1 24.5,46.1
  region net NetC16_1: 15.8,51.7 16.4,52.3 18.3,52.3 32.6,38 32.6,22.9 28.7,19 21.7,19 20.6,20.1 20.6,38.9 17.5,42 17.5,48.1 15.8,49.8 15.8,51.2

## Silkscreen, mask and mechanical layers (free items; w line width, h text height)
Top Overlay:
  drawing of 897 lines, arcs and shapes, not listed
  text "12" at 66.182,59.69 h1.2
  text "12" at 66.182,51.118 h1.2
  text "1" at 95.075,51.118 h1.2
  text "LOAD" at 141.43,46.355 h1.2 r90
  text "GND" at 71.51,40.323 h1.2
  text "RST" at 71.51,37.783 h1.2
  text "TEST" at 70.31,35.243 h1.2
  text "3V3" at 71.51,32.703 h1.2
  text "18VAC-3A" at 17.287,31.75 h1.2 r90
  text "UART" at 93.487,29.528 h1.2 r90
  text "TXD" at 94.757,27.623 h1.2
  text "RST" at 63.642,24.448 h1.2 r90
  text "RXD" at 94.757,23.813 h1.2
  text "~" at 13.795,16.51 h1.2
  text "220VAC" at 141.43,15.557 h1.2 r90
  text "~" at 13.795,11.43 h1.2
  text "18V" at 65.865,9.842 h1.2 r90
  text "5V" at 68.564,9.842 h1.2 r90
  text "GND" at 71.262,9.842 h1.2 r90
  text "GND" at 76.66,9.842 h1.2 r90
  text "18V" at 82.692,9.842 h1.2 r90
  text "GND" at 88.407,9.842 h1.2 r90
  text "18V" at 94.757,9.842 h1.2 r90
  text "TSOP1838x2" at 100.155,3.492 h1.2
  text "POWER" at 67.452,1.27 h1.2
  text "LEFT" at 80.47,1.27 h1.2
  text "RIGHT" at 90.312,1.27 h1.2

## Dimensions
0,0 to 143,0 on Mechanical 2
0,0 to 0,70 on Mechanical 2

## Text inside footprints (layer, text, board x,y; h text height)
C9: Top Overlay "+" at 48.593,53.229 h1.5 r270; Mechanical 1 "+" at 48.855,51.665 h1 r270; Mechanical 1 "1" at 48.855,50.365 h1 r270; Mechanical 1 "2" at 48.855,48.465 h1 r270
C10: Top Overlay "+" at 6.645,56.065 h1.5 r270; Mechanical 1 "+" at 6.445,53.365 h2 r270
C16: Top Overlay "+" at 23.773,35.495 h1.5; Mechanical 1 "2" at 37.822,35.595 h1.2; Mechanical 1 "1" at 30.422,35.595 h1.2; Mechanical 1 "+" at 26.872,35.495 h1.5
C17: Top Overlay "+" at 32.997,12.25 h1.5 r270; Mechanical 1 "+" at 32.797,9.55 h2 r270
D1: Mechanical 1 "1" at 9.485,22.96 h1 r270; Mechanical 1 "4" at 9.485,7.96 h1 r270; Mechanical 1 "-" at 7.585,7.76 h1 r270; Mechanical 1 "AC" at 7.485,13.46 h1 r270; Mechanical 1 "AC" at 7.485,18.56 h1 r270; Mechanical 1 "+" at 7.585,23.16 h1 r270
HD1: Mechanical 1 "4" at 76.914,40.704 h1.2 r90; Mechanical 1 "1" at 76.914,33.084 h1.2 r90
HD2: Mechanical 1 "3" at 70.287,5.215 h1; Mechanical 1 "1" at 65.387,5.215 h1
HD3: Mechanical 1 "1" at 93.106,24.829 h1.2 r90; Mechanical 1 "2" at 93.106,27.369 h1.2 r90
HD4: Mechanical 1 "12" at 67.997,56.987 h1 r180; Mechanical 1 "1" at 95.296,56.987 h1 r180
HD5: Mechanical 1 "12" at 67.997,65.75 h1 r180; Mechanical 1 "1" at 95.296,65.75 h1 r180
HD6: Mechanical 1 "3" at 82.035,5.215 h1; Mechanical 1 "1" at 77.135,5.215 h1
HD7: Mechanical 1 "3" at 92.83,5.215 h1; Mechanical 1 "1" at 87.93,5.215 h1
IC1: Mechanical 1 "GND" at 111.975,11.93 h1 r180; Mechanical 1 "VCC" at 110.475,12.33 h1 r90; Mechanical 1 "OUT" at 110.475,7.93 h1 r90; Mechanical 1 "3" at 108.029,8.636 h1.2 r90; Mechanical 1 "1" at 108.029,13.716 h1.2 r90
IC2: Mechanical 1 "GND" at 99.765,10.93 h1; Mechanical 1 "VCC" at 101.265,10.53 h1 r270; Mechanical 1 "OUT" at 101.265,14.93 h1 r270; Mechanical 1 "3" at 103.711,14.224 h1.2 r270; Mechanical 1 "1" at 103.711,9.144 h1.2 r270
IC3: Mechanical 1 "O" at 49.149,58.674 h1.2; Mechanical 1 "G" at 46.609,58.674 h1.2; Mechanical 1 "I" at 44.323,58.674 h1.2
IC4: Mechanical 1 "O" at 18.351,58.674 h1.2; Mechanical 1 "G" at 15.811,58.674 h1.2; Mechanical 1 "I" at 13.525,58.674 h1.2
IC5: Mechanical 1 "1" at 30.145,57.157 h1; Mechanical 1 "2" at 32.445,57.157 h1; Mechanical 1 "3" at 35.045,57.057 h1
IC6: Mechanical 1 "O" at 38.672,16.129 h1.2; Mechanical 1 "G" at 36.132,16.129 h1.2; Mechanical 1 "I" at 33.846,16.129 h1.2
IC7: Mechanical 1 "1" at 49.195,14.152 h1; Mechanical 1 "2" at 51.495,14.152 h1; Mechanical 1 "3" at 54.095,14.052 h1
Q1: Mechanical 1 "E" at 18.811,45.784 h0.8 r180; Mechanical 1 "C" at 16.271,45.784 h0.8 r180; Mechanical 1 "B" at 13.731,45.784 h0.8 r180
Q2: Mechanical 1 "C" at 107.635,23.095 h0.8; Mechanical 1 "E" at 102.435,23.095 h0.8; Mechanical 1 "B" at 105.035,23.095 h0.8
Q3: Mechanical 1 "C" at 120.335,53.575 h0.8; Mechanical 1 "E" at 115.135,53.575 h0.8; Mechanical 1 "B" at 117.735,53.575 h0.8
RL1: Mechanical 1 "3" at 125.27,27.59 h1.2; Mechanical 1 "2" at 125.27,39.69 h1.2; Mechanical 1 "4" at 113.07,27.69 h1.2; Mechanical 1 "5" at 113.17,39.79 h1.2; Mechanical 1 "1" at 111.27,33.69 h1.2
SP1: Mechanical 1 "1" at 127.595,61.795 h1.2 r270; Mechanical 1 "2" at 127.495,54.275 h1.2 r270
U1: Mechanical 1 "28" at 83.697,24.392 h1 r90; Mechanical 1 "15" at 83.697,31.892 h1 r90; Mechanical 1 "14" at 86.497,31.992 h1 r90
U2: Mechanical 1 "5" at 83.515,16.345 h0.8 r270; Mechanical 1 "6" at 85.515,16.345 h0.8 r270; Mechanical 1 "10" at 85.515,18.545 h0.8 r270
U3: Mechanical 1 "GND" at 84.215,14.835 h0.5 r270; Mechanical 1 "IO1" at 84.255,12.975 h0.5 r270; Mechanical 1 "IO2" at 85.065,13.085 h0.5 r270; Mechanical 1 "VCC" at 85.055,14.785 h0.5 r270